# Altium PCB Single_Stage_LNA_JX7820.9869A2.PcbDoc
Units mm, origin at the board's own origin, x right, y up, seen from the top; angles counter-clockwise.
Board outline 15.7 x 19.5 mm, 4 copper layers (Top, GND, VCC, Bottom), stack 0.899 mm thick; 44 components, 20 nets, 100 pads, 51 vias.
Unrouted connection lines stored in the file: 20.
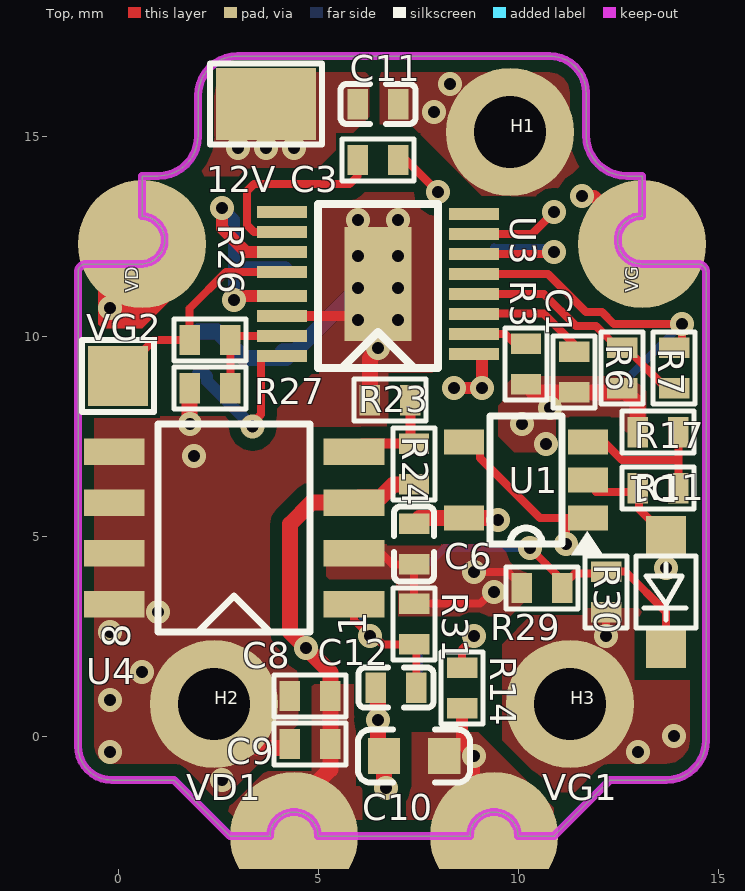
[diagram p0: Top view]
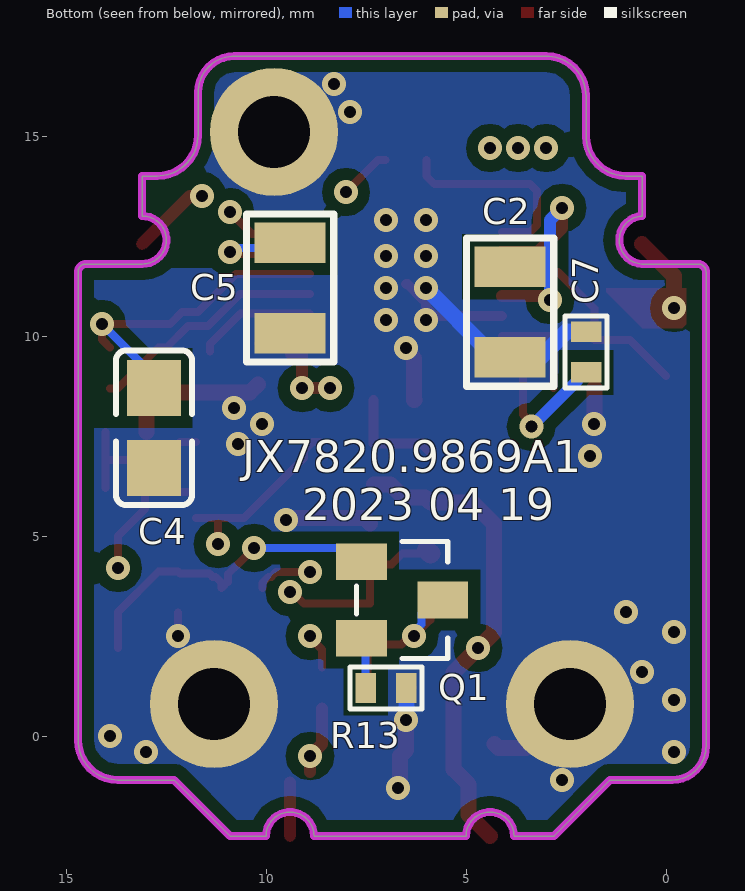
[diagram p1: Bottom view, seen from below]
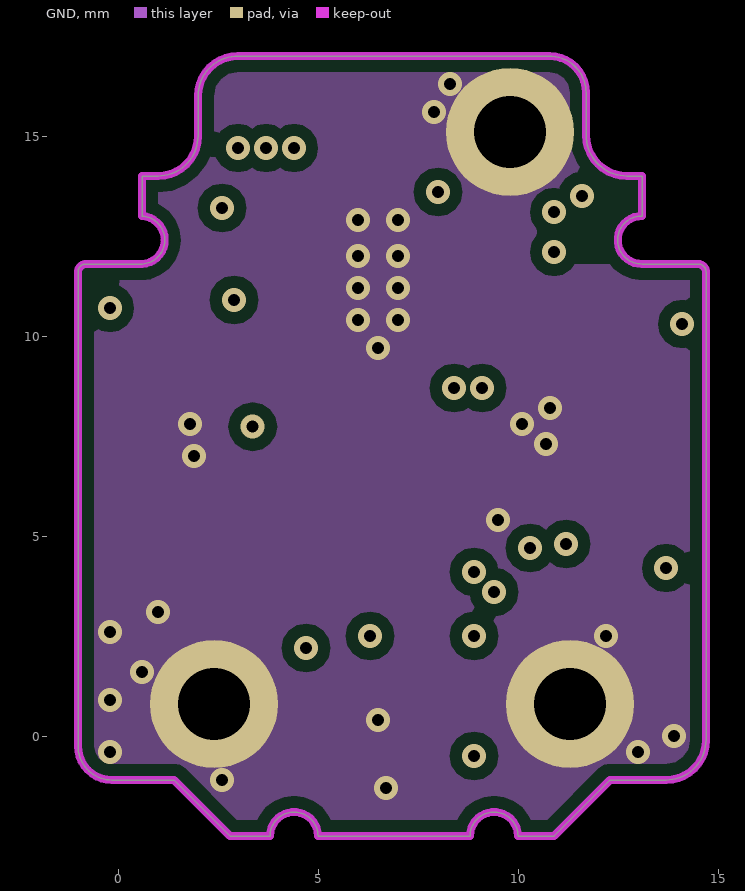
[diagram p2: GND]
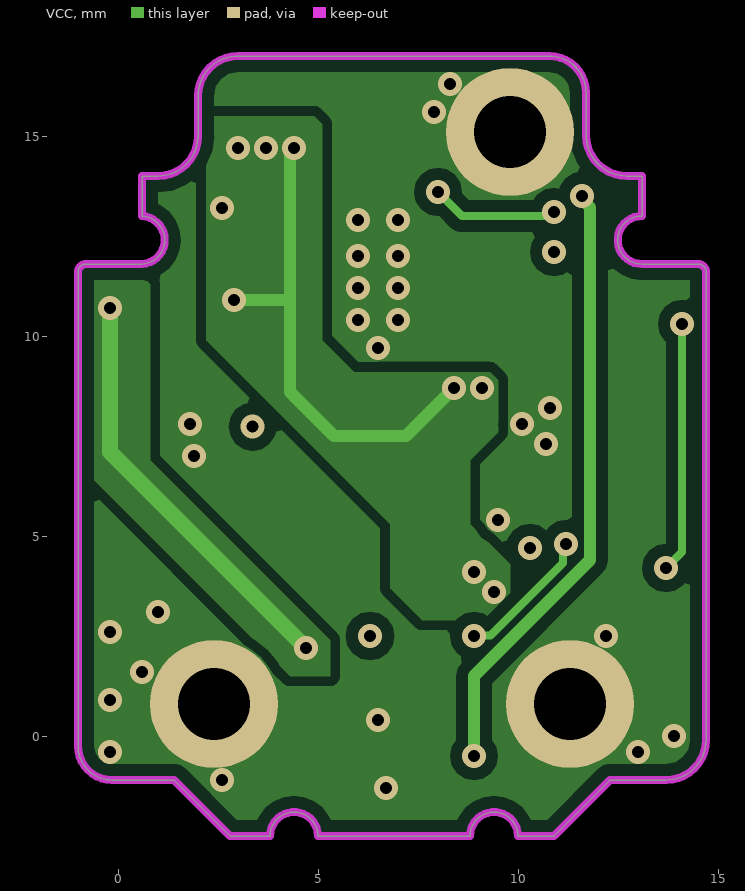
[diagram p3: VCC]

## Layer stack, top to bottom
Solder Mask Top: solder mask 0.0102, Solder Resist, Dk 3.5
Top: signal copper 0.0343
Dielectric 1: dielectric 0.254, FR-4, Dk 4.3
GND: signal copper 0.0343
Dielectric2: dielectric 0.254, FR-4, Dk 4.3
VCC: signal copper 0.0343
Dielectric3: dielectric 0.254, FR-4, Dk 4.3
Bottom: signal copper 0.0343
Solder Mask Bottom: solder mask 0.0102, Solder Resist, Dk 3.5

## Board outline
-0.154,-1.1 1.4,-1.1 2.8,-2.5 3.8,-2.5 cw(c4.4,-2.5) 5,-2.5 8.8,-2.5 cw(c9.4,-2.5) 10,-2.5 10.9,-2.5 12.3,-1.1 13.7,-1.1 ccw(c13.7,-0.1) 14.7,-0.1 14.7,11.6 ccw(c14.5,11.6) 14.5,11.8 13.1,11.8 cw(c13.092,12.4) 13.1,13 13.1,14 12.724,14 cw(c12.724,15.024) 11.7,15.024 11.7,16.084 ccw(c10.784,16.084) 10.784,17 3,17 ccw(c3,16) 2,16 2,15 cw(c1,15) 1,14 0.6,14 0.6,13 cw(c0.567,12.4) 0.603,11.8 cw(c0.597,11.9) 0.597,11.8 -0.8,11.8 ccw(c-0.8,11.6) -1,11.6 -1,-0.254 ccw(c-0.154,-0.254)

## Design rules (kind name [scope] priority, off if disabled: settings)
Clearance "Clearance - Default" [All] p1: gap=0.15 ignorepadtopadclearanceinfootprint=FALSE except(0: Arc-Hole Track-Hole SMDPad-Hole THPad-Hole Via-Hole Fill-Hole Poly-Hole Region-Hole Text-Hole; 0.254: Fill-Fill Fill-Poly Fill-Region Poly-Poly Poly-Region Region-Region Text-Text; 0.3: Arc-Fill Arc-Poly Arc-Region Track-Fill Track-Poly Track-Region SMDPad-Fill SMDPad-Poly SMDPad-Region THPad-Fill THPad-Poly THPad-Region Via-Fill Via-Poly Via-Region)
ComponentClearance "ComponentClearance - Default - DEFAULT" [All] p1: gap=0.152 collisioncheckmode=3 verticalgap=0.254 showdistances=FALSE
FanoutControl Fanout_Small [(CompPinCount < 5)] p1: bgadir=Out bgaviamode=Centered fanoutstyle=Auto fanoutdirection=OutThenIn viagrid=0.025 // Fanout_Small (Default Rule)
FanoutControl Fanout_SOIC [IsSOIC] p2: bgadir=Out bgaviamode=Centered fanoutstyle=Auto fanoutdirection=Alternating viagrid=0.025 // Fanout_SOIC (Default Rule)
FanoutControl Fanout_BGA [IsBGA] p3: bgadir=Out bgaviamode=Centered fanoutstyle=Auto fanoutdirection=Alternating viagrid=0.025 // Fanout_BGA (Default Rule)
FanoutControl Fanout_LCC [IsLCC] p4: bgadir=Out bgaviamode=Centered fanoutstyle=Auto fanoutdirection=Alternating viagrid=0.025 // Fanout_LCC (Default Rule)
HoleSize [All] p1: absolutevalues=TRUE maxlimit=10 minlimit=0.025 maxpercent=80.000 minpercent=20.000
HoleToHoleClearance "HoleToHoleClearance - Default - DEFAULT" [All] p1: gap=0.152 allowstackedmicrovias=TRUE
Length "Default Length" [All] p1: maxlimit=1270 minlimit=0
MaxMinImpedance "Default Impedance" [All] p1: minimum=50.00 maximum=150.0
ParallelSegment "Default Parallel Segment Same Layer" [All] p1: limit=25.4 gap=5.08
ParallelSegment "Default Parallel Segment Adjasent" [All] p2: limit=25.4 gap=5.08
PolygonConnect [All] p1: connectstyle=Direct reliefconductorwidth=0.254 reliefentries=4 polygonreliefangle="90 Angle" airgapwidth=0.254
RoutingLayers "RoutingLayers - Default - DEFAULT" [All] p1: top layer_v5=TRUE mid layer 1_v5=TRUE mid layer 2_v5=TRUE bottom layer_v5=TRUE
RoutingPriority "RoutingPriority - Default - DEFAULT" [All] p1: routingpriority=3
RoutingTopology "Default Routing Topology" [All] p1: topology=Shortest
RoutingVias [All] p1: holewidth=0.3 width=0.6 viastyle="Through Hole" minholewidth=0.3 minwidth=0.6 maxholewidth=0.3 maxwidth=0.6
SMDToCorner "SMDToCorner - Default - DEFAULT" [All] p1: distance=60000
SolderMaskExpansion "SolderMaskExpansion from CAM settings" [All] p1: expansion=0.127
Width "Default Width" [All] p1: maxlimit=2 minlimit=0.2 preferedwidth=0.2
20 further rules are at their usual default settings.

## Classes and differential pairs
component class DC_DC: 12V C1 C2 C3 C4 C5 C6 C7 C8 C9 C10 C11 D1 H1 H2 H3 M1 M4 Q1 R3 R6 R7 R11 R13 R14 R17 R23 R24 R26 R27 R29 R30 R31 U1 U3 U4 VD VD1 VG VG1 VG2

## Components (designator, comment, footprint, x,y, rotation, side; value= is the part's Value field where it differs from the comment)
12V "JP" JP_2.5X1.8 3.7,15.8 r0 top locked
C1 "C1005X7R1H103K050BB" C0402#1 11.4,9.1 r180 top
C2 "CC0805X5RLM106RL" C0805#1 3.9,10.6 r0 bottom
C3 "C1005X5R1E105K050BC" C0402#1 6.5,14.4 r270 top
C4 "CC0805X5RLM106RL" C0805#2 12.8,7.7 r270 bottom
C5 "C2012X5R1H475M125AB" C0805#1 9.4,11.2 r180 bottom
C6 "C1005X5R1E105K050BC" C0402#2 7.4,4.8 r90 top
C7 "C1005X7R1H103K050BB" C0402#1 2,9.6 r0 bottom
C8 "C1005X5R1E105K050BC" C0402#1 4.8,1 r270 top
C9 "C1005X5R1E105K050BC" C0402#1 4.8,-0.2 r270 top
C10 "C1608X5R1H105M" C0603 7.4,-0.5 r180 top
C11 "C1005X5R1E105K050BC" C0402#2 6.5,15.8 r0 top
C12 "Comment" C0402#2 6.95,1.21 r0 top
D1 "MM3Z4V3T1G" SOD-323 13.7,3.6 r90 top
H1 "1#-72" P3.2-1.8 9.8,15.1 r0 top locked
H2 "1#-72" P3.2-1.8 2.4,0.8 r0 top locked
H3 "1#-72" P3.2-1.8 11.3,0.8 r0 top locked
M1 "MARK" MARK -3.6,-0.1 r0 top
M2_1 "MARK" MARK 48.7,57.951 r0 top (schematic designator M2)
M3_1 "MARK" MARK 48.8,0.251 r180 bottom (schematic designator M3)
M4 "MARK" MARK -3.5,57.7 r180 bottom
Q1 "BC817-40LT1G" SOT-23 6.6,3.4 r270 bottom
R3 "RC0402JR-070RL" R0402 10.2,9.3 r270 top
R6 "RC0402FR-073K09L" R0402 12.6,9.2 r90 top
R7 "RC0402JR-0710KL" R0402 13.9,9.2 r90 top
R11 "RC0402FR-074K02L" R0402 13.5,6.2 r0 top
R13 "RC0402JR-071K1L" R0402 7,1.2 r0 bottom
R14 "RC0402JR-0710RL" R0402 8.6,1.2 r90 top
R17 "RC0402JR-071K1L" R0402 13.5,7.6 r0 top
R23 "RC0402JR-071KL" R0402 6.8,8.4 r0 top
R24 "RC0402FR-077K32L" R0402 7.4,6.8 r270 top
R26 "RC0402JR-0710KL" R0402 2.3,9.9 r180 top
R27 "RC0402FR-073K09L" R0402 2.3,8.7 r0 top
R29 "RC0402JR-0715KL" R0402 10.6,3.7 r180 top
R30 "RC0402JR-0710KL" R0402 12.2,3.6 r90 top
R31 "RC0402JR-0710KL" R0402 7.4,2.8 r90 top
U1 "TSX921ILT" SOT-23-5 10.2,6.4 r90 top
U3 "LTC3260MPMSE#PBF" MSOP-16-EP 6.5,11.3 r90 top
U4 "SPX3819S-L/TR" SOIC-8 2.9,5.2 r90 top
VD "JP" P3.2 0.6,12.3 r90 top locked
VD1 "JP" P3.2 4.4,-2.5 r0 top locked
VG "JP" P3.2 13.1,12.3 r90 top locked
VG1 "JP" P3.2 9.4,-2.5 r0 top locked
VG2 "JP" JP_1.5X1.5 0,9 r0 top

## Footprints (in the part's own frame and the unit in brackets; to place one, negate y for a bottom-side part, rotate by r counter-clockwise, add the part's x,y. Pads: shape width x height; smd on the part's side, far side on the other; paste and mask are expansions set on the pad)
C0402#1 [mil] "0402"
  rect 30x20 smd: 1(-0.01,20.01) 2(-0.01,-19.99)
  silkscreen extent -21,-35 20,36, body extent -10,-20 10,20, height 22
C0402#2 [mil]
  rect 20x30 smd: 1(-20.01,-0.01) 2(19.99,-0.01)
  silkscreen extent -37,-20 37,20, body extent -20,-11 20,11, height 20
C0603 [mil]
  rect 31.8x35.4 smd: 1(-29.7,0)
  rect 31.5x35.4 smd: 2(29.7,0)
  silkscreen extent -55,-26 55,26, body extent -31,-16 31,16, height 32
C0805#1 [mil] "0805"
  rect 70x40 smd: 1(0,44.51) 2(0,-44.49)
  silkscreen extent -43,-73 43,73, body extent -25,-39 25,39, height 31
C0805#2 [mil]
  rect 55.5x53.1 smd: 1(-39.4,0) 2(39.4,0)
  silkscreen extent -76,-37 76,37, body extent -39,-25 39,25, height 37
JP_1.5X1.5 [mm]
  rect 1.5x1.5 smd: 1(0,0)
  silkscreen extent -0.9,-0.9 0.9,0.9
JP_2.5X1.8 [mm]
  rect 2.5x1.8 smd: 1(0,0)
  silkscreen extent -1.4,-1.02 1.4,1.02
MARK [mm] "MARK"
  round 1 smd mask+1: 1(0,0)
  Top keep-out circle w0.1: c0,0 r1.5
MSOP-16-EP [mm]
  rect 0.305x1.25 smd: 1(-1.75,-2.4) 2(-1.25,-2.4) 3(-0.75,-2.4) 4(-0.25,-2.4) 5(0.25,-2.4) 6(0.75,-2.4) 7(1.25,-2.4) 8(1.75,-2.4) 9(1.8,2.4) 10(1.3,2.4) 11(0.8,2.4) 12(0.3,2.4) 13(-0.3,2.4) 14(-0.8,2.4) 15(-1.3,2.4) 16(-1.8,2.4)
  rect 2.845x1.676 smd: 17(0,0)
  silkscreen extent -2.1,-1.5 2,1.5, body extent -2.02,-2.45 2.02,2.45, height 1.1
P3.2 [mm]
  round 3.2 smd: 1(0,0)
P3.2-1.8 [mm]
  round 3.2 hole 1.8 mask+0.075: 1(0,0)
R0402 [mil]
  rect 20x30 smd: 1(-20.01,-0.01) 2(19.99,-0.01)
  silkscreen extent -36,-21 35,20, body extent -20,-10 20,10, height 16
SOD-323 [mm]
  rect 1x1 smd: 1(-1.4,0) 2(1.4,0)
  silkscreen extent -0.9,-0.75 0.9,0.75, body extent -1.25,-0.65 1.25,0.6, height 1.1
SOIC-8 [mil] "5*3.8mm,HE=6mm"
  rect 26x60 smd: 1(-75,-117.87) 2(-25,-117.87) 3(25,-117.87) 4(75,-117.87) 5(75,117.87) 6(25,117.87) 7(-25,117.87) 8(-75,117.87)
  silkscreen extent -102,-75 102,75, body extent -96,-118 96,118, height 69
SOT-23 [mil]
  rect 36x50 smd: 1(-37.5,-40) 2(37.5,-40) 3(0,40)
  silkscreen extent -58,-45 58,45, body extent -57,-47 57,47, height 44
SOT-23-5 [mm] "3*1.7*1.45 mm"
  rect 0.635x1 smd: 1(-0.95,-1.549) 2(0,-1.549) 3(0.95,-1.549) 4(0.95,1.549) 5(-0.95,1.549)
  silkscreen extent -1.88,-1.94 1.6,0.9, body extent -1.5,-1.42 1.5,1.43, height 1.3

## Part data
C1 C7: "贴片电容_X7R_50V_0.01UF_±10%", 制造商=TDK, 物料代码=1245000201, 物料名称=通用电容
C2 C4: "Ceramic_10uF_20%_X5R_35V", 制造商=TDK, 物料代码=1245000242, 物料名称=通用电容
C3 C6 C8 C9 C11: "0402_1UF_25V_±10%", 制造商=TDK, 物料代码=1245000247, 物料名称=通用电容
C5: "0805_4.7UF 50V ±20％", 制造商=TDK, 物料代码=1245000215, 物料名称=通用电容
C10: "贴片电容_X5R_50V_1u_20%", 制造商=TDK, 物料代码=1245000143, 物料名称=通用电容
C12: library part C0402MRX5R6BB106
D1: "通用二极管_稳压二极管_4.3V_200mW", 制造商=Onsemi, 物料代码=1228000005, 物料名称=通用二极管
Q1: "通用BJT_NPN_45V_0.5A", 制造商=Onsemi, 物料代码=1225000002, 物料名称=通用BJT
R3: "0402_0Ω_1/16W_±1%", 制造商=YAGEO, 物料代码=1231000567, 物料名称=通用电阻
R6 R27: "0402-3.09K ±1%", 制造商=YAGEO, 物料代码=1231000503, 物料名称=通用电阻
R7 R26 R30 R31: "Thick Film-SMD/SMT_10kΩ_5%", 制造商=YAGEO, 物料代码=1231000312, 物料名称=通用电阻
R11: "0402_4.02K_±1%", 制造商=YAGEO, 物料代码=1231000444, 物料名称=通用电阻
R13 R17: "贴片电阻_1.1KΩ_5%_100ppm_50V_1/16W", 制造商=YAGEO, 物料代码=1231000034, 物料名称=通用电阻
R14: "电阻0402-10R 5%", 制造商=YAGEO, 物料代码=1231000313, 物料名称=通用电阻
R23: "贴片电阻_1KΩ_5%_100ppm_50V_1/16W", 制造商=YAGEO, 物料代码=1231000314, 物料名称=通用电阻
R24: "0402_7.32K_1/16W_±1%", 制造商=YAGEO, 物料代码=1231000565, 物料名称=通用电阻
R29: "0402_15K_±5%", 制造商=YAGEO, 物料代码=1231000432, 物料名称=通用电阻
U3: library part LTC3260EMSE, "电源IC_双极性输出电荷泵_4.5～32V_100mA", 制造商=LT, 物料代码=1218000027, 物料名称=电源IC
U4: "IC REG LIN POS ADJ 500MA 8SOIC", 制造商=maxim

## Via types
v1: diameter 0.6, hole 0.3, Top to Bottom, tented both sides, 51 vias

## Nets (pads, with @x,y where several pads share a name; then routed paths per layer and width w, separated by ;. In a path a pad name is that pad's centre, name@x,y a point inside that pad or via, vN(x,y) a via of type N, cw(c..) or ccw(c..) an arc to the next point about the centre after c; other vN are vias at no path point)
10V: C8.1 C9.1 R24.2 U4.3 VD1.1 VD.1 | length 24.5
  Top w0.4: v1(-0.2,10.7) -0.2,11.5 VD.1 ; VD1.1 4.936,-1.964 4.936,-1.207 5.308,-0.834 C9.1 5.308,1.592 4.3,2.6 4.3,5.3 4.835,5.835 U4.3 6.024,5.965 6.565,5.965 6.892,6.292 R24.2@7.3,6.292
  VCC w0.4: v1(-0.2,10.7) -0.2,7.1 v1(4.7,2.2)
GND: C1.1 C2.1 C4.2 C5.2 C6.2 C7.2 C8.2 C9.2 C10.2 C11.2 C12.1 H1.1 H2.1 H3.1 R3.2 R6.1 R13.1 R17.1 R23.1 R27.1 R30.1 U1.5 U3.14 U3.17 U4.5 U4.6 U4.7 U4.8 | length 23
  Top w0.2: v1(12.2,2.5) R30.1
  Top w0.25: U3.14 5.787,10.5 U3.17@5.958,10.671 ; v1(6,10.4) v1(6,11.2) ; U3.17@6.081,10.919 6.462,11.3 U3.17
  Top w0.4: R27.1 1.792,7.808 v1(1.8,7.8) ; H2.1 3.5,-0.3 4.192,-0.3 C9.2 ; R23.1 6.296,8.404 6.296,9.442 6.5,9.646 v1(6.5,9.7) ; C12.1 6.495,1.156 6.495,0.857 6.5,0.852 v1(6.5,0.4) 6.5,-0.354 C10.2 6.646,-1.246 v1(6.7,-1.3) ; C6.2 7.543,5.45 U1.5 9.45,5.45 v1(9.5,5.4) ; R3.2 10.4,8.592 C1.1 12.5,8.592 R6.1 12.992,8.3 R17.1
  Bottom w0.4: C7.2 2.492,10.108 3.145,9.455 C2.1@4.2,9.455 ; C2.1@4.124,9.608 4.42,9.608 6,11.189 v1(6,11.2) ; R13.1 6.492,0.408 v1(6.5,0.4)
  other v1: 2.6,-1.1 -0.2,-0.4 13,-0.4 13.9,0 -0.2,0.9 0.6,1.6 -0.2,2.6 1,3.1 1.9,7 10.7,7.3 10.1,7.8 10.8,8.2 7,10.4 7,11.2 6,12 7,12 6,12.9 7,12.9 7.9,15.6 8.3,16.3
NetC1_2: C1.2 U3.3 | length 3
  Top w0.2: U3.3 8.915,10.565 10.635,10.565 11.4,9.8 C1.2
NetC3_1: C3.1 U3.7 | length 6.7
  Top w0.2: C3.1@7.008,14.4 7.2,14.4 v1@7.9,13.7 ; U3.7 10.35,12.55 v1(10.9,13.1)
  VCC w0.2: v1@7.9,13.7 8.6,13 10.8,13 v1(10.9,13.1)
  other v1: 8,13.6
NetC3_2: C3.2 U3.10 | length 5.1
  Top w0.2: U3.10 3.4,12.6 3.225,12.775 3.225,13.625 3.4,13.8 5.792,13.8 5.992,14 C3.2@5.992,14.4
NetC4_1: C4.1 D1.2 R7.2 R11.1 U1.2 U3.5 | length 18.2
  Top w0.2: U3.5 10.75,11.55 11.703,10.597 12.097,10.597 12.395,10.3 v1(14.1,10.3) 14.1,9.911 14.051,9.862 R7.2 ; U1.2@11.949,6.1 12.892,6.1 R11.1 13.025,6.167 13.025,5.675 13.3,5.4 D1.2 v1(13.7,4.2)
  VCC w0.2: v1(13.7,4.2) 14.1,4.6 v1(14.1,10.3)
  Bottom w0.2: C4.1 12.8,9 v1(14.1,10.3)
NetC5_1: C5.1 U3.6 | length 3.4
  Top w0.2: U3.6 v1@10.7,12.05 ; v1@10.8,11.95 10.8,12 v1(10.9,12.1)
  Bottom w0.2: C5.1@9.4,12.216 9.416,12.2 v1@10.8,12.2
NetC7_1: C7.1 U3.16 | length 4.3
  Top w0.2: v1(3.366,7.735) 3.366,7.825 3.575,8.034 3.575,9.448 3.627,9.5 U3.16
  Bottom w0.3: C7.1@2.009,9.092 2.127,9.092 2.231,8.988 2.231,8.87 v1(3.366,7.735)
NetD1_2: D1.1 Q1.1 R29.1 R30.2 | length 8.1
  Top w0.2: v1(10.3,4.7) 10.704,4.296 10.954,4.046 10.954,3.854 R29.1 11.108,3.827 11.262,3.981 11.336,3.981 11.416,4.062 12.154,4.062 R30.2 12.692,4.108 13.7,3.1 D1.1
  Bottom w0.2: Q1.1@7.816,4.353 8.163,4.7 v1(10.3,4.7)
NetQ1_2: Q1.2 R13.2 | length 1
  Bottom w0.2: R13.2 Q1.2@7.508,2.156
NetQ1_3: C12.2 Q1.3 R31.1 U4.1 | length 4.4
  Top w0.2: U4.1 5.894,2.906 v1(6.3,2.5) 6.408,2.5 6.617,2.292 R31.1 7.457,2.235 C12.2
  Bottom w0.2: Q1.3@5.784,3.4 6.119,3.065 6.119,2.789 6.3,2.608 v1(6.3,2.5)
NetR3_1: R3.1 U3.2 | length 1.4
  Top w0.2: U3.2 9.678,10.05 9.919,9.808 R3.1
NetR6_2: R6.2 R7.1 U3.4 | length 6
  Top w0.2: U3.4 10.645,11.05 11.447,10.247 11.953,10.247 12.492,9.708 R6.2 12.692,9.708 13.708,8.692 R7.1
NetR11_2: R11.2 R17.2 U1.3 | length 3.8
  Top w0.2: U1.3 12.15,7.35 12.6,6.9 14.008,6.9 ; R11.2 14.008,6.9 ; R17.2 14.008,6.9
NetR14_2: R14.2 U1.1 U1.4 | length 9
  Top w0.2: R14.2 8.6,2.16 8.9,2.46 v1(8.9,2.5) ; U1.4 8.833,7.35 9.051,7.132 9.051,6.95 10.551,5.45 11.2,5.45 ; v1(11.2,4.8) 11.2,5.45 ; U1.1 11.2,5.45
  VCC w0.2: v1(8.9,2.5) 8.912,2.512 9.312,2.512 11.123,4.323 11.123,4.723 v1(11.2,4.8)
NetR23_2: R23.2 R24.1 U4.4 | length 2.6
  Top w0.25: U4.4 6.097,7.308 7.308,7.308 R23.2
NetR26_1: R26.1 R27.2 U3.15 | length 2.6
  Top w0.2: R27.2 R26.1 2.808,10 U3.15
NetR26_2: R26.2 U3.12 VG2.1 | length 5.6
  Top w0.2: VG2.1 0.9,9.9 R26.2 1.792,10.692 2.7,11.6 U3.12
VG: C10.1 R14.1 VG1.1 VG.1 | length 20.3
  Top w0.3: R14.1 8.6,-0.2 v1(8.9,-0.5) 8.9,-0.9 ; VG1.1 VG1.1@9.4,-1.16 ; v1(11.6,13.5) 11.9,13.5 VG.1
  VCC w0.3: v1(8.9,-0.5) 8.9,1.5 11.8,4.4 11.8,13.219 11.6,13.419 v1(11.6,13.5)
VIN: 12V.1 C2.2 C6.1 C11.1 R29.2 R31.2 U3.1 U3.11 U3.13 U4.2 | length 28
  Top w0.2: U4.2 6.594,4.565 6.867,4.292 C6.1 R31.2 9.053,3.308 9.345,3.6 v1(9.4,3.6) ; v1(8.9,4.1) 9.749,4.1 9.867,3.981 9.938,3.981 10.092,3.827 R29.2
  Top w0.3: v1(2.6,13.2) 2.6,12.7 3.2,12.1 U3.11 ; v1(2.9,10.9) 3,11 U3.13 ; v1(8.4,8.7) v1(9.1,8.7) 9.1,9.548 9.102,9.55 U3.1@9.373,9.55
  Top w0.5: U4.2 U4.2@5.974,4.645
  VCC w0.3: v1(2.9,10.9) 4.3,10.9 ; v1@4.3,14.8 4.3,10.9 ; v1(8.4,8.7) 7.2,7.5 5.4,7.5 4.3,8.6 4.3,10.9
  Bottom w0.3: v1(2.6,13.2) 2.9,12.9 2.9,11.716 ; v1(2.9,10.9) 2.9,11.716 ; C2.2@4.2,11.716 2.9,11.716
  other v1: 3,14.7 3.7,14.7 4.4,14.7
pads on no net: M1.1 M2_1.1 M3_1.1 M4.1 U3.8 U3.9

## Polygon pours and split planes (outlines as drawn)
VIN on Top "+10" (solid, remove dead copper, pour order 20): 9.5,4.8 10.2,4.1 10.2,3.4 9.8,3 7,3 7,3.7 6.8,3.9 5.3,3.9 5.2,4 5.2,4.8
GND on Top "VD" (solid, pour order 14): 14.7,3.2 10.5,3.2 9.6,2.3 9.6,-0.1 10.9,-1.4 14,-1.4 14.7,-0.7 14.7,1.1
GND on Top "VD" (solid, pour order 15): 5,7.4 5.3,7.7 7.5,7.7 8.1,8.3 8.1,13.6 5,13.6 5,9.2 3.8,8 -1,8 -1,-0.5 0,-1.5 2.7,-1.5 4.5,0.3 4.5,1.5 5,2
10V on Top "VD" (solid, pour order 16): 6.1,1.3 4.9,1.3 4.7,1.1 4.7,0.3 2.6,-1.8 2.6,-2.3 2.9,-2.6 6.1,-2.6
GND on Top "+10" (solid, remove dead copper, pour order 19): 9.9,9 9.5,8.6 9.5,7.5 9.9,7.1 10.9,7.1 11,7.2 11,7.7 11.3,8 12.3,8 12.7,7.6 13.2,7.6 13.2,8.8 13,9 12.9,9
VG on Top "VD" (solid, pour order 17): 9,0.1 7.2,0.1 7.2,-2.5 10.9,-2.5 10.9,-1.8 10.7,-1.6
VIN on Top "VD" (solid, pour order 13): 6.3,17 2.5,17 2,16.5 2,14 4.8,14 6.3,15.5
GND on Top "VD" (solid, pour order 12): 5.6,17 5.6,15.9 6.2,15.3 7.3,15.3 9.1,13.5 10.8,13.5 11.7,14.4 11.7,16.7 11.4,17 6.1,17
GND on VCC "VCC-GND" (solid, remove dead copper, pour order 18): -1,17 14.7,17 14.7,-2.5 -1,-2.5
VIN on VCC "VCC-VIN" (solid, remove dead copper, pour order 5): 8.8,5.3 9.8,4.3 9.8,3.4 9.3,2.9 7.6,2.9 6.8,3.7 6.8,5.3 2.2,9.9 2.2,15.5 4.9,15.5 5.1,15.3 5.1,9.9 5.9,9.1 9.3,9.1 9.5,8.9 9.5,7.6 8.8,6.9
10V on VCC "VCC-10V" (solid, remove dead copper, pour order 3): -1,11.3 -1,6.8 4.3,1.5 5.3,1.5 5.3,2.4 0.8,6.9 0.8,11.3 0.6,11.5 -0.8,11.5
GND on GND "GND-GND" (solid, remove dead copper, pour order 0): -1,17 14.7,17 14.7,-2.5 -1,-2.5
GND on Bottom "Bottom-GND" (solid, remove dead copper, pour order 8): -1,17 14.7,17 14.7,-2.5 -1,-2.5

## Keep-outs
Keep-Out Layer:
  the board outline again, w0.2

## Other copper
Top:
  region net 10V: -0.5,11.2 -0.5,10.3 -0.4,10.2 0.6,10.2 1.5,11.1 1.5,11.2
GND:
  pour cut-out: 11.2,11.8 12.4,11.8 12.4,11.9 11.3,11.9
Bottom:
  pour cut-out: 11.2,11.7 12.5,11.7 12.5,11.8 11.3,11.8
  pour cut-out: 6.519,4.157 6.8,4.157 6.8,4.1 6.4,4.1
  pour cut-out: 13.774,7.696 14.323,7.696 14.323,7.781 13.723,7.781
Multi-Layer:
  text "VDD" at -6.513,-27.801 h0.01
  text "V-" at -6.748,-28.02 h0.01 r90
  text "V+" at -6.442,-28.048 h0.01 r90

## Silkscreen, mask and mechanical layers (free items; w line width, h text height)
Silkscreen Bottom:
  text "JX7820.9869A1" at 10.6,6.6 h0.8
  text "2023 04 19" at 9.1,5.4 h0.8
Layer_5:
  drawing of 273 lines, arcs and shapes, not listed
Drill Drawing:
  drawing of 318 lines, arcs and shapes, not listed

## Text inside footprints (layer, text, board x,y; h text height)
U4: Silkscreen Top "1" at 6.2,2.5 h0.7 r90; Silkscreen Top "8" at 0.3,2.2 h0.7 r90